# EAGLE board 02BA - Pressure (EAGLE 9.3.1)
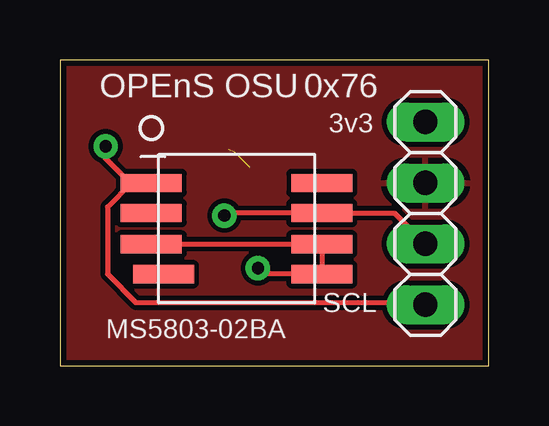
[diagram p0: board, top side]
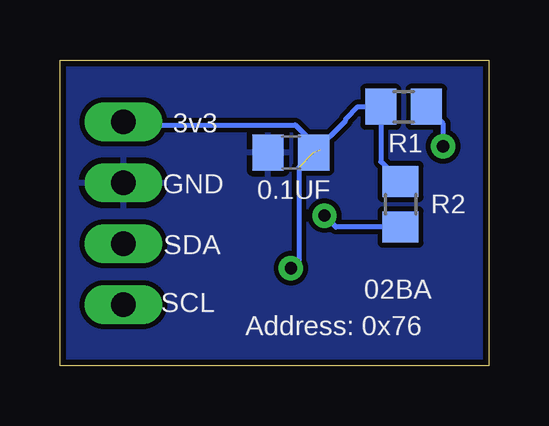
[diagram p1: board, bottom side, seen from below]

Size 17.89 x 12.75 mm. Coordinates in mm from the lower left corner, seen from the top.
Outline: 0,0 17.89,0 17.89,12.75 0,12.75 0,0
Copper layers (1*16): Top 0.035mm / dielectric 1.5mm / Bottom 0.035mm
Design rules "SparkFun": minimum track width 8mil, minimum drill 20mil, track to track 8mil, track to pad 8mil, pad to pad 8mil, via to via 8mil, smd to smd 8mil, copper to edge 10mil, drill to drill 8mil, minimum pad ring 12mil, minimum via ring 10mil, stop-mask expansion 4mil, vias tented up to drill 25mil, thermal gap 10mil

## Footprints (pad centres in the part's own frame; a part is rotated, then mirrored left to right if it is on the bottom)
C0805 = smd 1.3 x 1.5: 1 -0.95,0; 2 0.95,0
1X04 = drill 1.016 long: 1 -3.81,0; 2 -1.27,0; 3 1.27,0; 4 3.81,0
SMD = smd 2.54 x 0.762: CSB 3.556,0.65; GND 3.556,-0.65; NC 3.048,1.9; PS -3.556,0.65; SCLK 3.556,-1.9; SDI/SDA -3.556,-0.65; SDO -3.556,-1.9; VDD -3.556,1.9
R0805 = smd 1.3 x 1.5: 1 -0.95,0; 2 0.95,0

## Placement (x,y rotation side)
0.1UF  100nF  [C0805]  8.26,8.89 0 bottom
JP1  [1X04]  15.24,6.35 270 top
PRESSURE  MS5803-01BA  [SMD]  7.37,5.71 180 top
R1  7.7k  [R0805]  3.56,10.79 180 bottom
R2  7.7k  [R0805]  3.68,6.73 90 bottom

## Library data of the parts
0.1UF = rcl; SPICEPREFIX: C
JP1 = pinhead
PRESSURE = MS5803-01BA
R1 R2 = resistor

## Nets
+3V3: 0.1UF.2 JP1.1 PRESSURE.CSB PRESSURE.PS PRESSURE.VDD R1.2 R2.2
GND: 0.1UF.1 JP1.2
SCL: JP1.4 PRESSURE.SCLK R1.1
SDA: JP1.3 PRESSURE.SDI/SDA R2.1

## Tracks (layer width: path | path; a pad name or v marks a point on that pad's centre or on a via)
+3V3  (via drill 0.51)  (2 unrouted)
  Top 0.203: PRESSURE.CSB PRESSURE.PS PRESSURE.VDD 8.5,3.81 v8.26,4.06
  Bottom 0.203: JP1.1 15.11,10.03 8.07,10.03 7.04,9 | 7.92,8.27 7.92,4.39 v8.26,4.06 | R2.2 4.51,8.5 R1.2 5.46,10.79 5.97,10.29 5.97,10.23 0.1UF.2
GND
  pour Top: 0,0 0,12.7 17.91,12.7 17.91,0
  pour Bottom: 0,0 0,12.7 17.91,12.7 17.91,0
SCL  (via drill 0.51)
  Top 0.203: JP1.4 15.16,2.62 3.18,2.62 1.98,3.82 1.98,6.62 2.98,7.62 PRESSURE.SCLK 2.92,7.62 1.91,8.63 v1.91,9.14
  Bottom 0.203: v1.91,9.14 1.91,10.09 R1.1
SDA  (via drill 0.51)
  Top 0.203: JP1.3 13.96,6.37 PRESSURE.SDI/SDA 6.96,6.37 v6.86,6.26
  Bottom 0.203: R2.1 6.38,5.78 v6.86,6.26

## Text on the board
tPlace: OPEnS OSU | 0x76 | 3v3 | SCL | MS5803-02BA
bPlace: 3v3 | GND | SDA | 02BA | SCL | Address: 0x76